# Altium PCB MasterBoard (SurfaceMount).PcbDoc (part 1 of 3)
Units mil, origin at the board's own origin, x right, y up, seen from the top; angles counter-clockwise.
Board outline 2893 x 3176 mil, 4 copper layers (Top Layer, GROUND, POWER, Bottom Layer), stack 23.756 mil thick; 101 components, 58 nets, 327 pads, 95 vias.
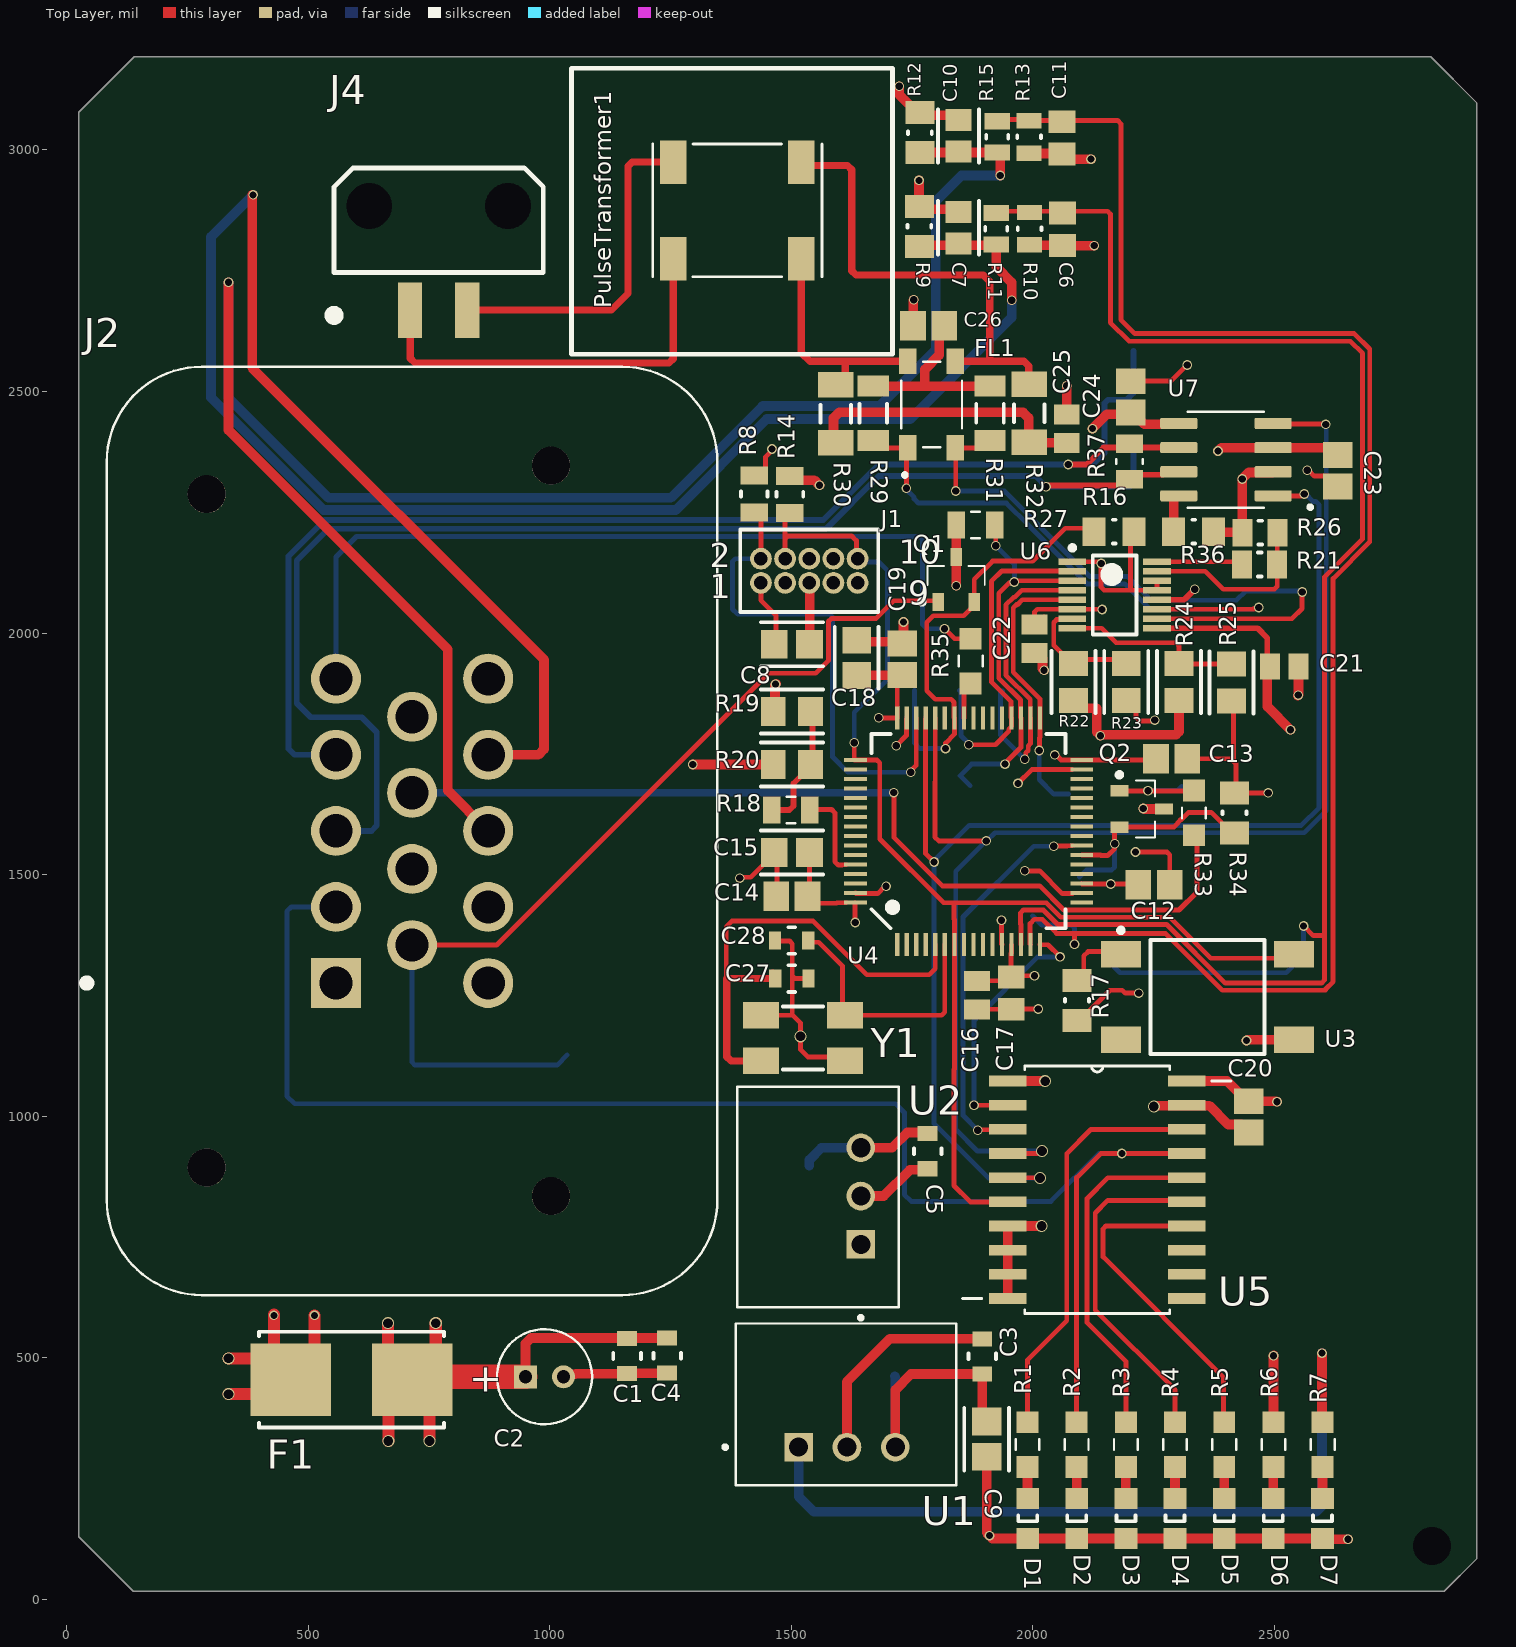
[diagram p0: Top Layer view]
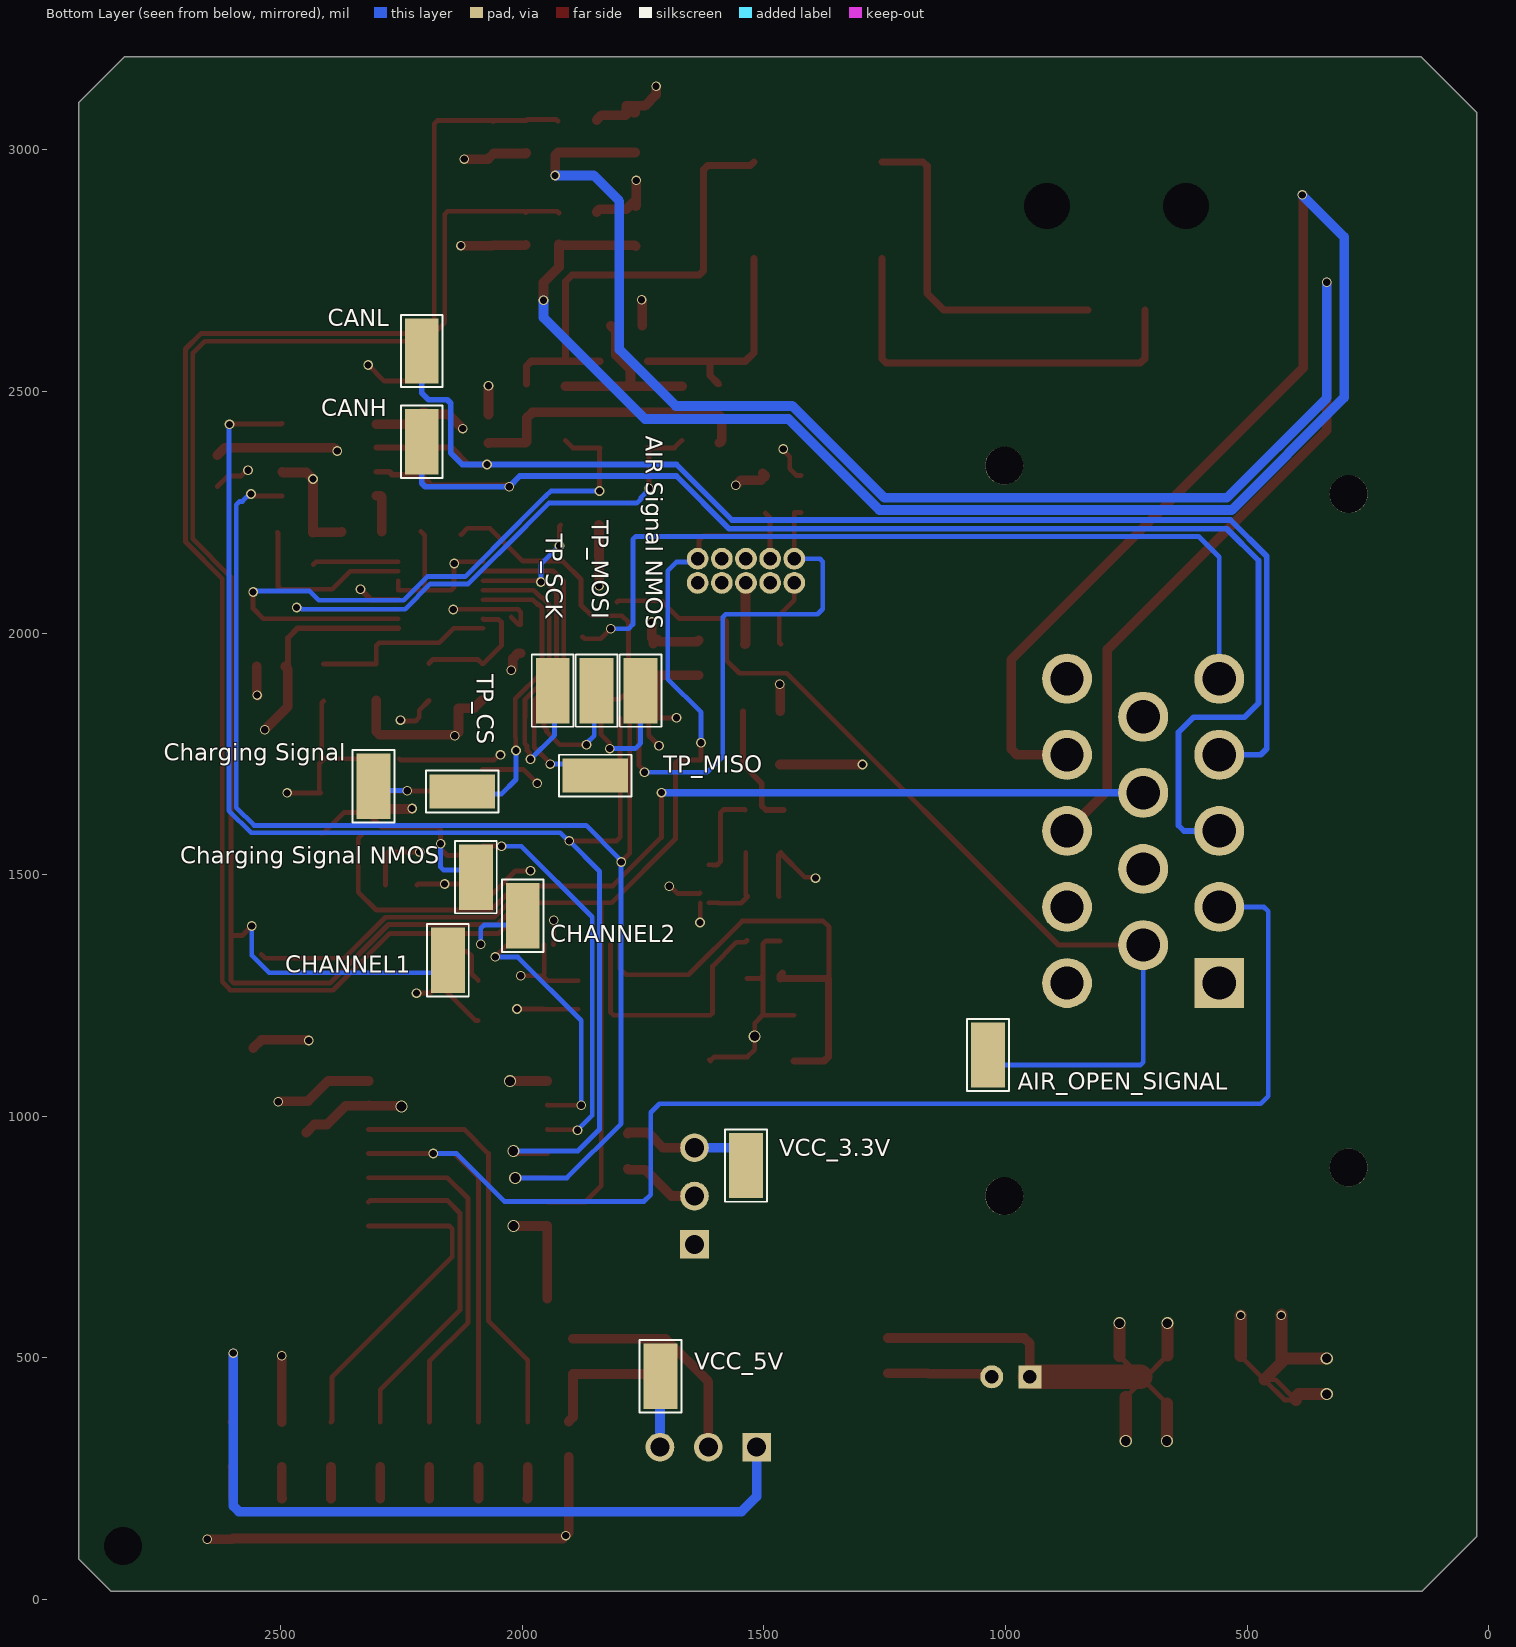
[diagram p1: Bottom Layer view, seen from below]
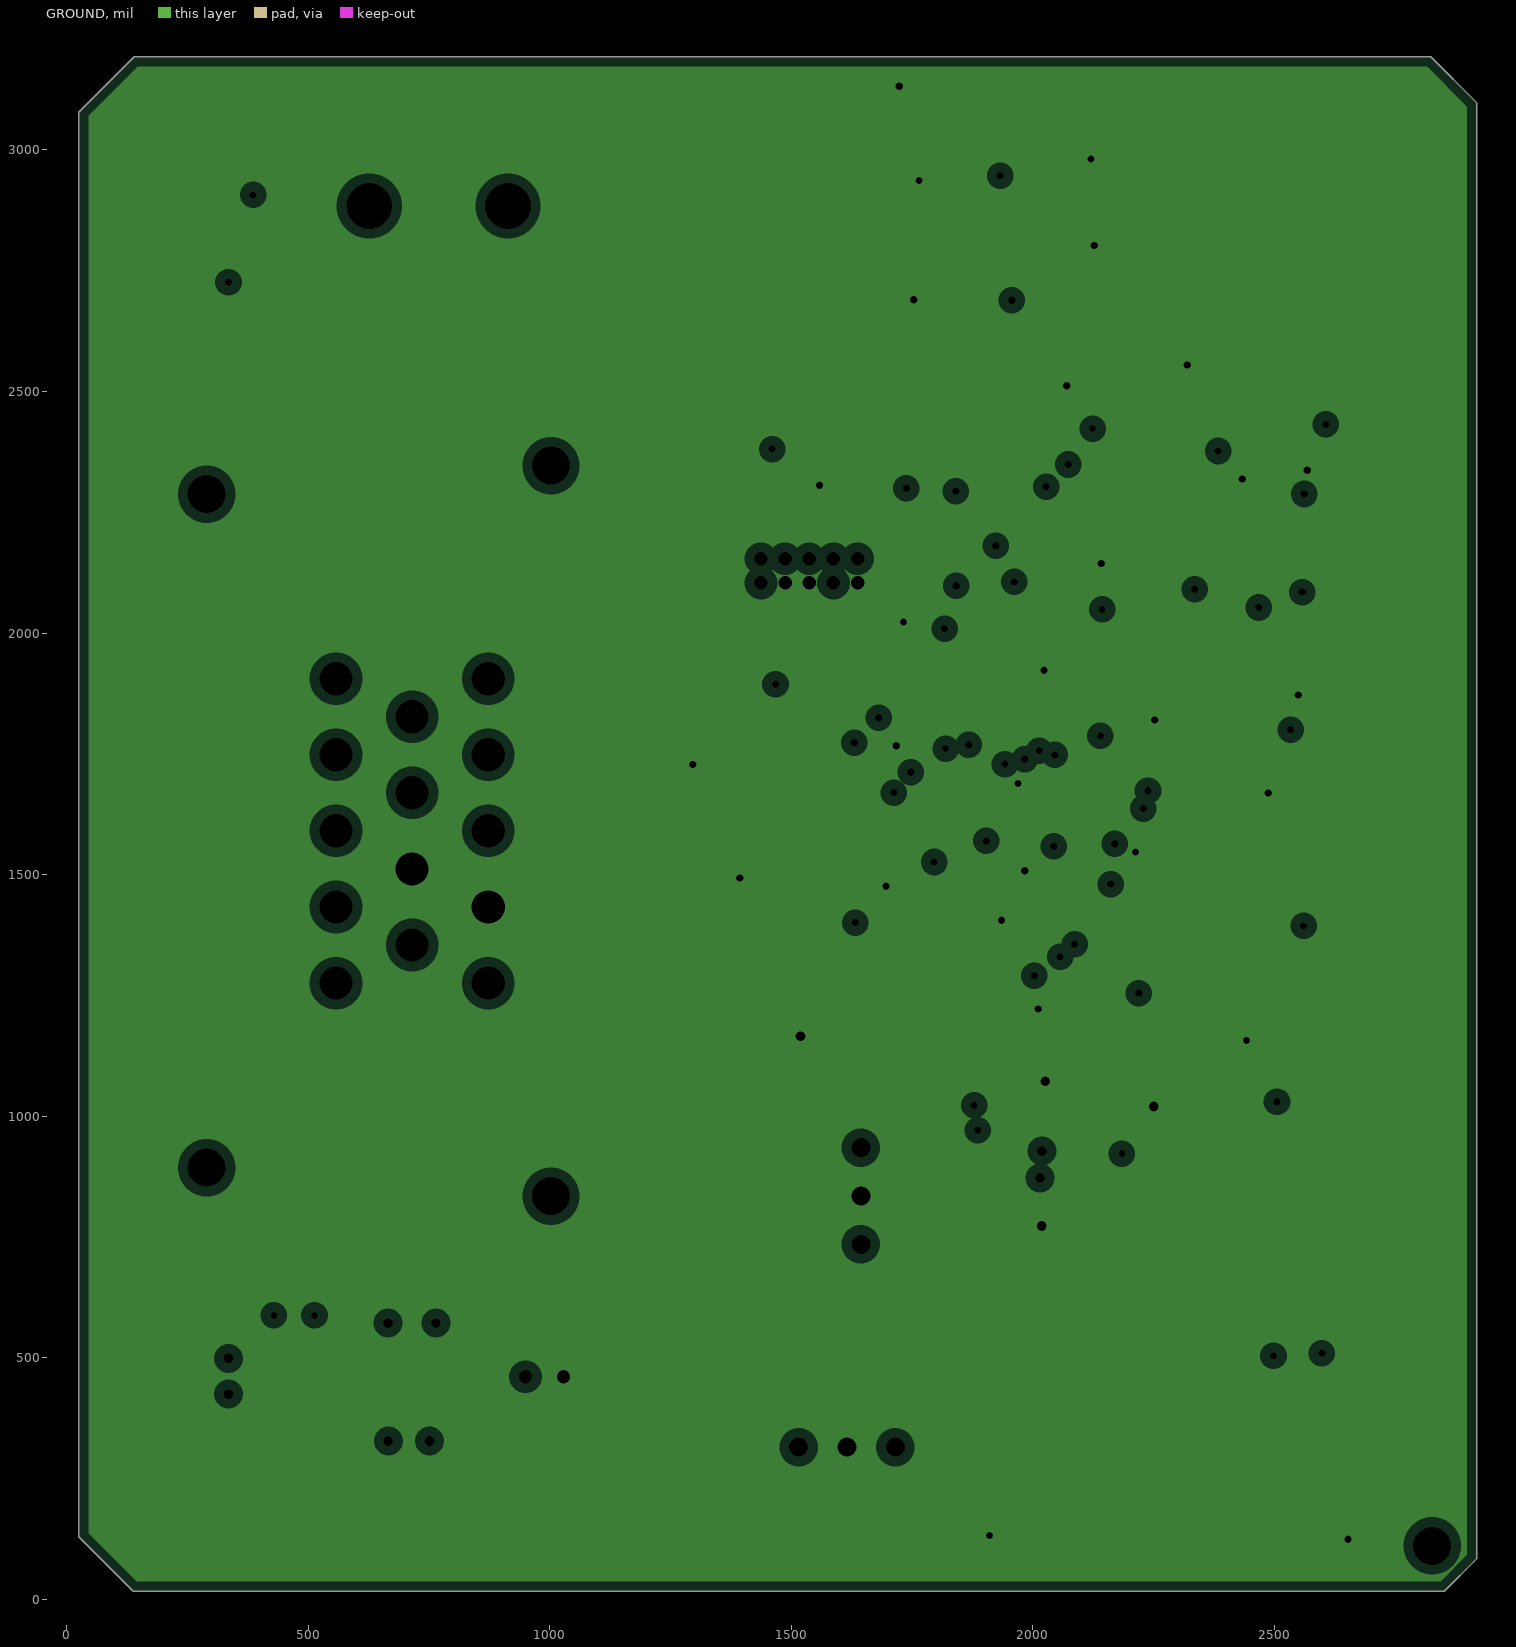
[diagram p2: GROUND, clearances drawn from the general rule]
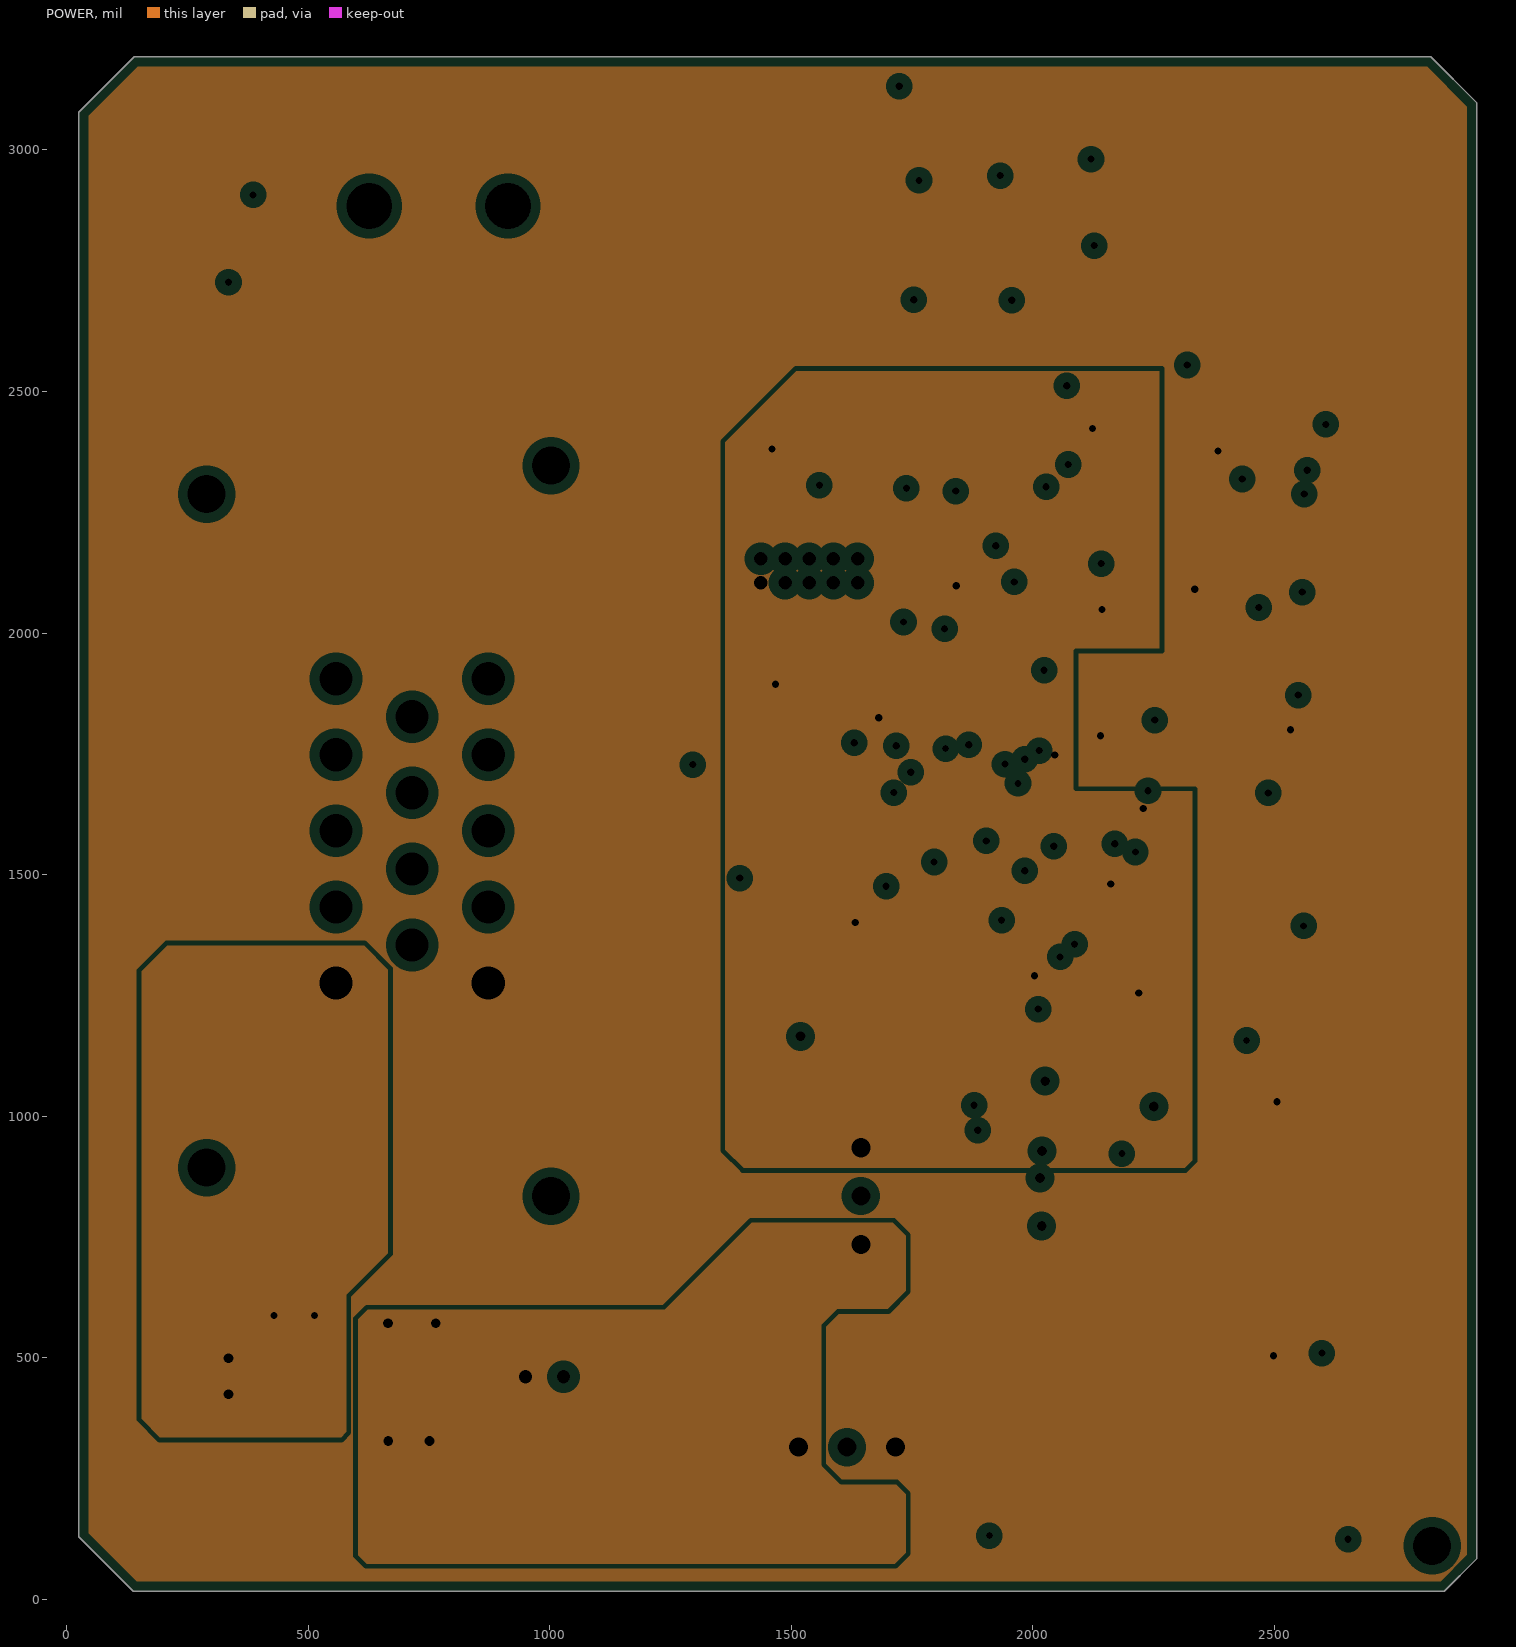
[diagram p3: POWER, clearances drawn from the general rule]
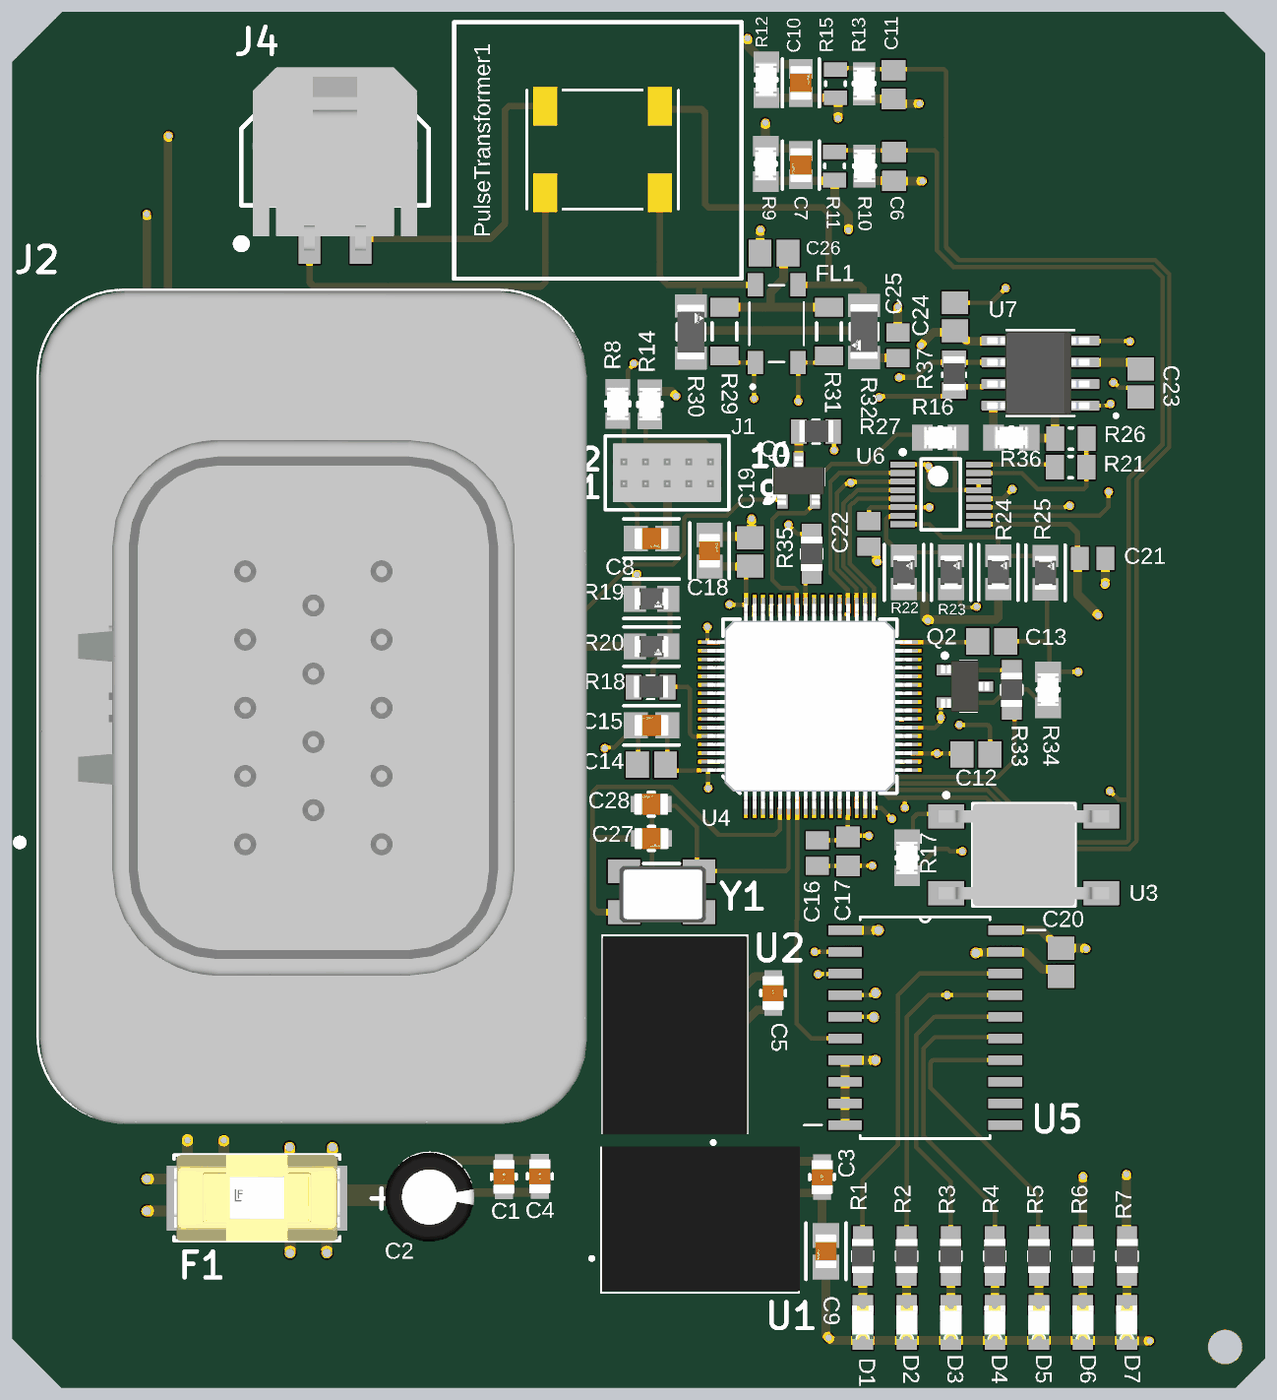
[diagram p5: 3D render of the assembled board from above, using the file's embedded part models]

## Layer stack, top to bottom
Top Solder: solder mask 0.4, Solder Resist, Dk 3.5
Top Layer: signal copper 1.4
Dielectric 2: prepreg 2.8, PP-006, Dk 4.1
GROUND: plane copper 1.378, net GND
Dielectric 1: dielectric 12.6, FR-4, Dk 4.8
POWER: plane copper 1.378, net (Multiple Nets)
Dielectric 3: prepreg 2.8, PP-006, Dk 4.1
Bottom Layer: signal copper 1.4
Bottom Solder: solder mask 0.4, Solder Resist, Dk 3.5

## Board outline
25,130 25,3078 140,3193 2823,3193 2918,3098 2918,84 2851,17 138,17

## Design rules (kind name [scope] priority, off if disabled: settings)
Clearance [All] p1: gap=7.87 ignorepadtopadclearanceinfootprint=TRUE except(5: Arc-Arc Arc-Track Arc-SMDPad Track-Track Track-SMDPad SMDPad-SMDPad; 10: Via-Via)
HoleSize [All] p1: absolutevalues=TRUE maxlimit=200 minlimit=1 maxpercent=80.000 minpercent=20.000
PlaneClearance [All] p1: clearance=20
PlaneConnect [All] p1: planeconnectstyle=Relief reliefexpansion=20 reliefentries=4 reliefconductorwidth=10 reliefairgap=10
PolygonConnect [All] p1: connectstyle=Relief reliefconductorwidth=10 reliefentries=4 polygonreliefangle="90 Angle" airgapwidth=10
RoutingVias [All] p1: holewidth=28 width=50 viastyle="Through Hole" minholewidth=28 minwidth=50 maxholewidth=28 maxwidth=50
SilkToSilkClearance [All] p1: silktosilkclearance=4
SilkToSolderMaskClearance [IsPad] p1: minsilkscreentomaskgap=5 clearancetoexposedcopper=TRUE
SolderMaskExpansion [All] p1: expansion=4 istentingtop=FALSE
Width [All] p1: maxlimit=50 minlimit=8 preferedwidth=10 minimp=50.000000 maximp=50.000000 favimp=50.000000
25 further rules are at their usual default settings.

## Classes and differential pairs
component class CONNECTORS: "AIR Signal NMOS" AIR_OPEN_SIGNAL C6 C7 C8 C9 C10 C11 CHANNEL1 CHANNEL2 "Charging Signal" "Charging Signal NMOS" J1 J2 J4 Q1 Q2 R8 R9 R10 R11 R12 R13 R14 R15 R16 R17 R33 R34 R35 U3
component class PROCESSOR: C12 C13 C14 C15 C16 C17 C18 C19 C20 C27 C28 R18 R19 R20 TP_CS TP_MISO TP_MOSI TP_SCK U4 U5 Y1
component class POWER: C1 C2 C3 C4 C5 D1 D2 D3 D4 D5 D6 D7 F1 R1 R2 R3 R4 R5 R6 R7 U1 U2 VCC_3.3V VCC_5V
component class COMMUNICATIONS: C21 C22 C23 C24 C25 C26 CANH CANL FL1 PulseTransformer1 R21 R22 R23 R24 R25 R26 R27 R29 R30 R31 R32 R36 R37 U6 U7

## Components (designator, comment, footprint, x,y, rotation, side; value= is the part's Value field where it differs from the comment)
"AIR Signal NMOS" "5015" 5015 1755,1881 r90 bottom
AIR_OPEN_SIGNAL "5015" 5015 1036,1127 r90 bottom
C1 "10uF" FP-C2012-125-0_2-MFG 1160,504 r270 top
C2 "10uF" CAPPRD200W50D550H1250 989,461 r0 top value=Value?
C3 "10uF" FP-C2012-125-0_2-MFG 1895,503 r90 top
C4 "10uF" FP-C2012-125-0_2-MFG 1243,505 r270 top
C5 "10uF" FP-C2012-125-0_2-MFG 1782,928 r270 top
C6 "GRM219R71C684KA01D" CAPC2013X95X45NL10T25 2061,2836 r270 top
C7 "GRM2195C1H103JA01D" FP-GRM219-0_1-IPC_B 1846,2839 r270 top
C8 "470nF" FP-GCM21B-0_15-IPC_A 1501,1977 r0 top
C9 "GRM21BR61A476ME15L" FP-GRM21B-0_2-e0_2_0_7-IPC_A 1904,332 r270 top
C10 "GRM2195C1H103JA01D" FP-GRM219-0_1-IPC_B 1846,3029 r90 top
C11 "GRM219R71C684KA01D" CAPC2013X95X45NL10T25 2060,3025 r90 top
C12 "100nF" CAPC2013X145X45NL30T25 2250.48,1479 r180 top
C13 "100nF" CAPC2013X145X45NL30T25 2287,1740 r180 top
C14 "100nF" CAPC2013X145X45NL30T25 1501,1455 r0 top
C15 "4.7uF" FP-GCM21B-0_15-IPC_A 1501,1546 r180 top
C16 "10nF" CAPC2013X70X45LL15T25 1884,1251 r90 top
C17 "1uF" CAPC2013X70X45NL10T25 1955,1255 r90 top
C18 "4.7uF" FP-GCM21B-0_15-IPC_A 1635,1949 r90 top
C19 "100nF" CAPC2013X145X45NL30T25 1729,1946 r270 top
C20 "100nF" CAPC2013X145X45NL30T25 2447,999 r90 top
C21 "10nF" CAPC2013X70X45LL15T25 2520,1931 r180 top
C22 "10nF" CAPC2013X70X45LL15T25 2003,1988 r90 top
C23 "100nF" CAPC2013X145X45NL30T25 2631,2336 r90 top
C24 "100nF" CAPC2013X145X45NL30T25 2202,2489 r270 top
C25 "10nF" CAPC2013X70X45LL15T25 2070,2423 r270 top
C26 "100nF" CAPC2013X145X45NL30T25 1784,2636 r0 top
C27 "18pF" FP-GQM219-0_15-MFG 1500.93,1284.93 r0 top
C28 "18pF" FP-GQM219-0_15-MFG 1500.38,1363.93 r180 top
CANH "5015" 5015 2208,2396 r90 bottom
CANL "5015" 5015 2208,2584 r90 bottom
CHANNEL1 "5015" 5015 2154,1323 r90 bottom
CHANNEL2 "5015" 5015 1999,1415 r90 bottom
"Charging Signal" "5015" 5015 2308,1683 r90 bottom
"Charging Signal NMOS" "5015" 5015 2096,1495 r90 bottom
D1 "HEARTBEAT" 0805_A 1989,167.74 r90 top
D2 "SHUTDOWN" 0805_A 2090.67,167.74 r90 top
D3 "CANRX" 0805_A 2192.33,167.74 r90 top
D4 "CANTX" 0805_A 2294,167.74 r90 top
D5 "RESET" 0805_A 2395.67,167.74 r90 top
D6 "5V" 0805_A 2497.33,167.74 r90 top
D7 "12V Fused" 0805_A 2599,167.74 r90 top
F1 "2A" FP-0154-MFG 589.61,455 r0 top value=0.0625Ω
FL1 "ACT45B-220-2P-TL003" FIL_ACT45B-220-2P-TL003 1790,2473 r90 top
J1 "SAMTEC-FTSH-105-01-X-D" SAMTEC-FTSH-105-01-X-D 1537,2129 r0 top
J2 "1-776261-1" TE_1-776261-1 715,1590.74 r90 top
J4 "43650-0209" 43650-0209 770,2884 r180 top
PulseTransformer1 "PE-68386NLT" PE-68386NL_PUL 1388,2875 r180 top
Q1 "SSM3K329R,LF" SOT23-3 1841,2111 r90 top
Q2 "SSM3K329R,LF" SOT23-3 2225,1636 r0 top
R1 "ERJP06J161V" RES_ERJP06J161V 1988.48,320.74 r90 top
R2 "ERJP06J161V" RES_ERJP06J161V 2090.32,320.74 r90 top
R3 "ERJP06J161V" RES_ERJP06J161V 2192.16,320.74 r90 top
R4 "ERJP06J161V" RES_ERJP06J161V 2294,320.74 r90 top
R5 "ERJP06J161V" RES_ERJP06J161V 2395.84,320.74 r90 top
R6 "ERJP06J161V" RES_ERJP06J161V 2497.68,320.74 r90 top
R7 "ERJP06J161V" RES_ERJP06J161V 2599.52,320.74 r90 top
R8 "CRCW0805100KFKEA" FP-CRCW0805-e3-MFG 1423,2288 r90 top
R9 "CRCW080512K0FKEA" FP-CRCW0805-e3-IPC_A 1765,2842 r90 top
R10 "CRCW08053K09FKEA" FP-CRCW0805-e3-IPC_C 1993,2837 r270 top
R11 "CRCW08051K60FKEA" RESC2013X50X30LL20T20 1924,2837 r90 top
R12 "CRCW080512K0FKEA" FP-CRCW0805-e3-IPC_A 1766,3036 r90 top
R13 "CRCW08053K09FKEA" FP-CRCW0805-e3-IPC_C 1992,3027 r270 top
R14 "CRCW0805100KFKEA" FP-CRCW0805-e3-MFG 1497,2287 r270 top
R15 "CRCW08051K60FKEA" RESC2013X50X30LL20T20 1926,3027 r90 top
R16 "CRCW080510K0FKEA" FP-CRCW0805-e3-IPC_A 2168,2210 r180 top
R17 "CRCW080510K0FKEA" FP-CRCW0805-e3-IPC_A 2091,1240 r270 top
R18 "2k, 1%, 0.4W" RESC2012X50N 1499,1634 r180 top
R19 "0r" FP-CRCW0805-HPe3-IPC_A 1501,1838 r180 top
R20 "0r" FP-CRCW0805-HPe3-IPC_A 1501,1728 r180 top
R21 "806R, 0.1%" RESC2013X50X30NL20T20 2469,2142 r180 top
R22 "0r" FP-CRCW0805-HPe3-IPC_A 2084,1899 r270 top
R23 "0r" FP-CRCW0805-HPe3-IPC_A 2193,1899 r270 top
R24 "0r" FP-CRCW0805-HPe3-IPC_A 2302,1899 r270 top
R25 "0r" FP-CRCW0805-HPe3-IPC_A 2411,1898 r270 top
R26 "1.21K, 0.1%, 1/5W" RESC2013X50X30NL20T20 2470,2208 r0 top
R27 "2k, 1%, 0.4W" RESC2012X50N 1881,2224 r180 top
R29 "ERJ-8ENF62R0V" RESC3216X70X50NL05T20 1669.54,2455 r270 top
R30 "CRCW1206300RFKEA" FP-CRCW1206-e3-IPC_A 1592,2454 r90 top
R31 "ERJ-8ENF62R0V" RESC3216X70X50NL05T20 1911,2455 r90 top
R32 "CRCW1206300RFKEA" FP-CRCW1206-e3-IPC_A 1992,2455 r270 top
R33 "ERJP06J161V" RES_ERJP06J161V 2333,1628 r270 top
R34 "CRCW080510K0FKEA" FP-CRCW0805-e3-IPC_A 2417,1628 r270 top
R35 "ERJP06J161V" RES_ERJP06J161V 1871,1942 r90 top
R36 "10k, 1%, 1/8W" FP-CRCW0805-e3-IPC_A 2332.33,2210 r0 top
R37 "120r, 0.1%, 1/8w" RESC2012X55N 2200,2355 r270 top
TP_CS "5015" 5015 2124,1672 r180 bottom
TP_MISO "5015" 5015 1849,1705 r0 bottom
TP_MOSI "5015" 5015 1846,1881 r90 bottom
TP_SCK "5015" 5015 1937,1881 r90 bottom
U1 "R-78E5.0-1.0" CONV_R-78E5.0-1.0 1615,404 r0 top
U2 "R-78E3.3-1.0" CONV_R-78E3.3-1.0 1555,835 r90 top
U3 "TL3301NF260QG" TECO-FSM4JSMA_V 2361,1247 r90 top
U4 "STM32F091RCT6" TQFP64 1866.75,1590.1 r0 top
U5 "74ACT541SC" SOIC127P1032X265-20N 2133,848 r0 top
U6 "LTC6820IMS#TRPBF" TSSOP50P490X110-16N 2169,2079 r0 top
U7 "NXP CAN Transceiver" "NXP CAN Tranceiver" 2399.36,2359 r180 top
VCC_3.3V "5015" 5015 1537,898 r90 bottom
VCC_5V "5015" 5015 1714,462 r90 bottom
Y1 "48MHZ" OSCCC500X320X110-4N 1524,1162 r0 top

## Footprints (in the part's own frame and the unit in brackets; to place one, negate y for a bottom-side part, rotate by r counter-clockwise, add the part's x,y. Pads: shape width x height; smd on the part's side, far side on the other; paste and mask are expansions set on the pad)
0805_A [mm] "Chip LED, 2-Leads, Body 2.0x1.3mm, IPC Medium Density"
  rect 1.1x1.2 smd: 1(-1.05,0) 2(1.05,0)
  silkscreen extent -0.15,-0.5 0.15,0.5, body extent -1,-0.62 1,0.63, height 0.68
5015 [mm] "SMD Test Point"
  rect 3.43x1.78 smd: 1(0,0)
  silkscreen extent -1.9,-1.1 1.9,1.1, body extent -1.27,-0.51 1.4,0.51, height 1.52
43650-0209 [mm]
  rect 1.27x2.92 smd: 1(1.5,5.47) 2(-1.5,5.47)
  round 0 hole 2.41 unplated: ""(-3.65,0) ""(3.65,0)
  silkscreen extent -5.5,-2 5.7,5.95, body extent -4.82,-4.6 4.83,6.14, height 5.64
CAPC2013X70X45LL15T25 [mm] "Chip Capacitor, 2-Leads, Body 2.00x1.25mm, IPC High Density"
  rect 1.05x1.35 smd: 1(-0.75,0) 2(0.75,0)
  body extent -1.08,-0.7 1.07,0.7, height 0.7
CAPC2013X70X45NL10T25 [mm] "Chip Capacitor, 2-Leads, Body 2.00x1.25mm, IPC Medium Density"
  rect 1.2x1.4 smd: 1(-0.85,0) 2(0.85,0)
  body extent -1.05,-0.67 1.05,0.67, height 0.7
CAPC2013X95X45NL10T25 [mm] "Chip Capacitor, 2-Leads, Body 2.00x1.25mm, IPC Medium Density"
  rect 1.2x1.4 smd: 1(-0.85,0) 2(0.85,0)
  body extent -1.05,-0.67 1.05,0.67, height 0.95
CAPC2013X145X45NL30T25 [mm] "Chip Capacitor, 2-Leads, Body 2.00x1.25mm, IPC Medium Density"
  rect 1.35x1.55 smd: 1(-0.825,0) 2(0.825,0)
  body extent -1.15,-0.77 1.15,0.77, height 1.45
CAPPRD200W50D550H1250 [mm]
  rect 1.208x1.208 hole 0.7: 1(-1,0)
  round 1.208 hole 0.7: 2(1,0)
  silkscreen extent -2.5,-2.5 2.5,2.5, body extent -2.65,-2.72 2.61,2.52, height 11.01
CONV_R-78E3.3-1.0 [mm]
  rect 1.508x1.508 hole 1: 1(-2.54,-2.25)
  round 1.508 hole 1: 2(0,-2.25) 3(2.54,-2.25)
  silkscreen extent -6.5,-4.25 5.75,4.25, body extent -5.93,-4.25 5.67,4.25, height 9.9
CONV_R-78E5.0-1.0 [mm]
  rect 1.508x1.508 hole 1: 1(-2.54,-2.25)
  round 1.508 hole 1: 2(0,-2.25) 3(2.54,-2.25)
  silkscreen extent -6.5,-4.25 5.75,4.25, body extent -5.8,-4.17 5.8,4.33, height 9.9
FIL_ACT45B-220-2P-TL003 [mm]
  rect 1.35x0.9 smd: 1(-2.275,1.25) 2(-2.275,-1.25) 3(2.275,-1.25) 4(2.275,1.25)
  silkscreen extent -3.8,-1.6 2.25,1.6
FP-0154-MFG [mm]
  rect 4.24x3.81 smd paste+0 mask+0: 1(-3.185,0) 2(3.185,0)
  silkscreen extent -4.86,-2.51 4.86,2.51, body extent -5.41,-2.62 5.41,2.62, height 0.25
FP-C2012-125-0_2-MFG [mm]
  rect 0.8x1.05 smd paste+0 mask+0: 1(-0.925,0) 2(0.925,0)
  silkscreen extent -0.15,-0.72 0.15,0.72, body extent -1.43,-0.82 1.43,0.82, height 0.25
FP-CRCW0805-e3-IPC_A [mil]
  rect 47.5x59.38 smd paste+0 mask+0: 1(-41.37,0) 2(41.37,0)
  silkscreen extent -3,-25 3,25, body extent -85,-49 85,49, height 10
FP-CRCW0805-e3-IPC_C [mil]
  rect 31.75x51.5 smd paste+0 mask+0: 1(-33.5,0) 2(33.5,0)
  silkscreen extent -3,-25 3,25, body extent -53,-31 53,31, height 10
FP-CRCW0805-e3-MFG [mm]
  rect 0.95x1.45 smd paste+0 mask+0: 1(-0.975,0) 2(0.975,0)
  silkscreen extent -0.13,-0.7 0.13,0.7, body extent -1.55,-0.82 1.55,0.82, height 0.25
FP-CRCW0805-HPe3-IPC_A [mil]
  rect 51.42x59.38 smd paste+0 mask+0: 1(-38.43,0) 2(38.43,0)
  silkscreen extent -64,-45 64,45, body extent -84,-49 84,49, height 10
FP-CRCW1206-e3-IPC_A [mil]
  rect 53.39x73.16 smd paste+0 mask+0: 1(-60.08,0) 2(60.08,0)
  silkscreen extent -19,-31 19,31, body extent -106,-56 106,56, height 10
FP-GCM21B-0_15-IPC_A [mil]
  rect 55.34x59.38 smd paste+0 mask+0: 1(-36.47,0) 2(36.47,0)
  silkscreen extent -64,-45 64,45, body extent -84,-49 84,49, height 10
FP-GQM219-0_15-MFG [mm]
  rect 0.65x0.95 smd paste+0 mask+0: 1(-0.875,0) 2(0.875,0)
  silkscreen extent -0.18,-0.7 0.18,0.7, body extent -1.3,-0.8 1.3,0.8, height 0.25
FP-GRM21B-0_2-e0_2_0_7-IPC_A [mil]
  rect 57.27x61.27 smd paste+0 mask+0: 1(-36.45,0) 2(36.45,0)
  silkscreen extent -65,-46 65,46, body extent -85,-50 85,50, height 10
FP-GRM219-0_1-IPC_B [mil]
  rect 45.58x53.63 smd paste+0 mask+0: 1(-32.57,0) 2(32.57,0)
  silkscreen extent -55,-43 55,43, body extent -65,-37 65,37, height 10
"NXP CAN Tranceiver" [mm]
  rrect25% 1.95x0.59 smd: 1(-2.48,1.905) 2(-2.48,0.635) 3(-2.48,-0.635) 4(-2.48,-1.905) 5(2.48,-1.905) 6(2.48,-0.635) 7(2.48,0.635) 8(2.48,1.905)
  silkscreen extent -4.53,-2.52 2,2.59, body extent -2.87,-2.45 3.13,2.45, height 1.75
OSCCC500X320X110-4N [mm]
  rect 1.9x1.4 smd: 1(-2.2,-1.2) 2(2.2,-1.2) 3(2.2,1.2) 4(-2.2,1.2)
  silkscreen extent -1.05,-1.65 1.05,1.65, body extent -2.46,-1.8 2.62,1.5, height 1.1
PE-68386NL_PUL [mil]
  rect 55x90 smd paste-27.5 mask+0: 1(-132.5,100) 2(-132.5,-100) 3(132.5,-100) 4(132.5,100)
  silkscreen extent -175,-138 175,138, body extent 0,0 10,10, height 10
RES_ERJP06J161V [mm]
  rect 1.15x1.15 smd: 1(-1.175,0) 2(1.175,0)
  silkscreen extent -0.28,-0.63 0.28,0.63, body extent -1,-0.62 1,0.63, height 0.6
RESC2012X50N [mm]
  rect 0.92x1.42 smd: 1(-1,0) 2(1,0)
  silkscreen extent -0.22,-0.7 0.22,0.7, body extent -1.03,-0.65 0.97,0.6, height 0.5
RESC2012X55N [mm]
  rect 0.97x1.42 smd: 1(-0.93,0) 2(0.93,0)
  silkscreen extent -0.12,-0.7 0.12,0.7, body extent -1.08,-0.62 0.92,0.63, height 0.55
RESC2013X50X30LL20T20 [mm] "Chip Resistor, 2-Leads, Body 2.00x1.25mm, IPC High Density"
  rect 0.85x1.35 smd: 1(-0.825,0) 2(0.825,0)
  silkscreen extent -0.1,-0.58 0.1,0.58, body extent -1.1,-0.72 1.1,0.72, height 0.5
RESC2013X50X30NL20T20 [mm] "Chip Resistor, 2-Leads, Body 2.00x1.25mm, IPC Medium Density"
  rect 1.05x1.45 smd: 1(-0.925,0) 2(0.925,0)
  silkscreen extent -0.1,-0.63 0.1,0.63, body extent -1.1,-0.72 1.1,0.72, height 0.5
RESC3216X70X50NL05T20 [mm] "Chip Resistor, 2-Leads, Body 3.20x1.60mm, IPC Medium Density"
  rect 1.1x1.65 smd: 1(-1.425,0) 2(1.425,0)
  silkscreen extent -0.5,-0.72 0.5,0.72, body extent -1.63,-0.82 1.62,0.82, height 0.7
SAMTEC-FTSH-105-01-X-D [mil]
  round 45 hole 27.95 mask+0: 1(-100,-25) 2(-100,25) 3(-50,-25) 4(-50,25) 5(0,-25) 6(0,25) 7(50,-25) 8(50,25) 9(100,-25) 10(100,25)
  silkscreen extent -143,-85 143,85, body extent -125,-67 125,68, height 219
SOIC127P1032X265-20N [mil]
  rect 78x22 smd: 1(-185,225) 2(-185,175) 3(-185,125) 4(-185,75) 5(-185,25) 6(-185,-25) 7(-185,-75) 8(-185,-125) 9(-185,-175) 10(-185,-225) 11(185,-225) 12(185,-175) 13(185,-125) 14(185,-75) 15(185,-25) 16(185,25) 17(185,75) 18(185,125) 19(185,175) 20(185,225)
  silkscreen extent -279,-256 277,256
SOT23-3 [mm] "SOT23, 3-Leads, Body 2.90x2.40mm, Pitch 0.95mm, IPC Medium Density"
  rect 0.95x0.6 smd: 1(-1.175,0.95) 2(-1.175,-0.95) 3(1.175,0)
  silkscreen extent -1.3,-1.5 0.7,1.92, body extent -1.42,-1.5 1.42,1.5, height 1.2
TE_1-776261-1 [mm]
  rect 2.625x2.625 hole 1.75: 1(-8,4)
  round 2.625 hole 1.75: 2(-4,4) 3(0,4) 4(4,4) 5(8,4) 6(-6,0) 7(-2,0) 8(2,0) 9(6,0) 10(-8,-4) 11(-4,-4) 12(0,-4) 13(4,-4) 14(8,-4)
  round 2 hole 2 unplated: ""(-19.2,-7.3) ""(-17.7,10.8) ""(17.7,10.8) ""(19.2,-7.3)
  silkscreen extent -24.4,-16.05 24.4,17.3, body extent -24.51,-16.18 24.29,15.92, height 34.29
TECO-FSM4JSMA_V [mm] "SMD, 4-Leads, Body 6x6mm, Pitch 4.5mm"
  rect 1.4x2.1 smd: 1(2.25,4.55) 2(2.25,-4.55) 3(-2.25,4.55) 4(-2.25,-4.55)
  silkscreen extent -3,-3 3.62,4.67, body extent -3,-5 3,5, height 5.08
TQFP64 [mm]
  rect 0.22x1.2 smd paste-2: 1(-3.75,-5.95) 2(-3.25,-5.95) 3(-2.75,-5.95) 4(-2.25,-5.95) 5(-1.75,-5.95) 6(-1.25,-5.95) 7(-0.75,-5.95) 8(-0.25,-5.95) 9(0.25,-5.95) 10(0.75,-5.95) 11(1.25,-5.95) 12(1.75,-5.95) 13(2.25,-5.95) 14(2.75,-5.95) 15(3.25,-5.95) 16(3.75,-5.95) 33(3.75,5.95) 34(3.25,5.95) 35(2.75,5.95) 36(2.25,5.95) 37(1.75,5.95) 38(1.25,5.95) 39(0.75,5.95) 40(0.25,5.95) 41(-0.25,5.95) 42(-0.75,5.95) 43(-1.25,5.95) 44(-1.75,5.95) 45(-2.25,5.95) 46(-2.75,5.95) 47(-3.25,5.95) 48(-3.75,5.95)
  rect 1.2x0.22 smd paste-2: 17(5.95,-3.75) 18(5.95,-3.25) 19(5.95,-2.75) 20(5.95,-2.25) 21(5.95,-1.75) 22(5.95,-1.25) 23(5.95,-0.75) 24(5.95,-0.25) 25(5.95,0.25) 26(5.95,0.75) 27(5.95,1.25) 28(5.95,1.75) 29(5.95,2.25) 30(5.95,2.75) 31(5.95,3.25) 32(5.95,3.75) 49(-5.95,3.75) 50(-5.95,3.25) 51(-5.95,2.75) 52(-5.95,2.25) 53(-5.95,1.75) 54(-5.95,1.25) 55(-5.95,0.75) 56(-5.95,0.25) 57(-5.95,-0.25) 58(-5.95,-0.75) 59(-5.95,-1.25) 60(-5.95,-1.75) 61(-5.95,-2.25) 62(-5.95,-2.75) 63(-5.95,-3.25) 64(-5.95,-3.75)
  silkscreen extent -5.1,-5.1 5.1,5.1, body extent -6,-6 6,6, height 1.58
TSSOP50P490X110-16N [mm] "TSSOP, 16-Leads, Body 3.77x3.00mm, Pitch 0.50mm, IPC Medium Density"
  rect 1.45x0.35 smd: 1(-2.225,1.75) 2(-2.225,1.25) 3(-2.225,0.75) 4(-2.225,0.25) 5(-2.225,-0.25) 6(-2.225,-0.75) 7(-2.225,-1.25) 8(-2.225,-1.75) 9(2.225,-1.75) 10(2.225,-1.25) 11(2.225,-0.75) 12(2.225,-0.25) 13(2.225,0.25) 14(2.225,0.75) 15(2.225,1.25) 16(2.225,1.75)
  silkscreen extent -2.35,-2.08 1.15,2.6, body extent -1.55,-2.05 1.55,2.05, height 1.1

## Part data
"AIR Signal NMOS" AIR_OPEN_SIGNAL CANH CANL CHANNEL1 CHANNEL2 "Charging Signal" "Charging Signal NMOS" TP_CS TP_MISO TP_MOSI TP_SCK VCC_3.3V VCC_5V: "SMD Test Point", Manufacturer="Keystone Electronics", ComponentLink1Description=Datasheet, ComponentLink1URL=http://www.mouser.com/ds/2/215/005-5009-743680.pdf, PartNumber=5015, Published=22Oct2016, Publisher=T.Tallo, Status=Active, TargetLibrary=RITRacing-Connectors
C1 C3 C4 C5: library part CMP-08246-003655-1, "Multilayer Ceramic Capacitors 10μF ±10% 16V X6S SMD 0805", Case Code (Imperial)=0805, Case Code (Metric)=2012, Dielectric=X6S, Dielectric Material=Ceramic, Max Operating Temperature=105°C, Min Operating Temperature=-55°C, Package Quantity=1, Supplier Part Number 1=445-7611-1-ND, Tolerance=10%, Voltage Rating=16V, Capacitance=10uF, Case/Package=0805, Construction=Flat, Contact Plating=Tin, Depth=1.25mm, Height=1.25mm, Lead Free="Lead Free", Length=2mm, Mount="Surface Mount", Packaging="Tape and Reel", REACH SVHC="No SVHC", RoHS Compliant=Yes, Series=C, Supplier 1=Digi-Key, Thickness=0.057inch, Voltage Rating (DC)=16V, Width=0.049inch
C2: library part "Cap, TH, Electrolytic_5mm", "Cap Alum 10UF 20% 25V Radial", Manufacturer 1=KEMET, Manufacturer Part Number 1=ESW106M025AC3AA, Supplier Part Number 1=399-ESW106M025AC3AA-ND, Pricing 1="1=0.23000, 10=0.15400, 50=0.09260, 100=0.07820, 500=0.05352, 1000=0.04735, 2500=0.04529, 5000=0.04117 (USD)", Published=22Oct2016, Publisher=T.Tallo, RoHS Compliant=Yes, Status=Active, Stock 1=7476, Supplier 1=Digi-Key, TargetLibrary=RITRacing-Passives
C6 C11: library part CMP-2007-00190-1, Capacitance=680nF, Case Code (Imperial)=0805, Case Code (Metric)=2012, Dielectric=X7R, Manufacturer=Murata, Max Operating Temperature=125°C, Min Operating Temperature=-55°C, Package Quantity=1, Supplier Part Number 1=490-4741-1-ND, Tolerance=10%, Voltage=16V, Case/Package=0805, Category="Ceramic Capacitors", ComponentLink1Description=https://datasheet.ciiva.com/136/grm219r71c684ka01-01-136854.pdf?src-supplier=Digi-Key, ComponentLink1URL=https://datasheet.ciiva.com/136/grm219r71c684ka01-01-136854.pdf?src-supplier=Digi-Key, ComponentLink2Description=https://datasheet.ciiva.com/136/grm219r71c684ka01-01-136855.pdf?src-supplier=Digi-Key, ComponentLink2URL=https://datasheet.ciiva.com/136/grm219r71c684ka01-01-136855.pdf?src-supplier=Digi-Key, ComponentLink3Description=https://datasheet.ciiva.com/136/grm219r71c684ka01-01-136856.pdf?src-supplier=Digi-Key, ComponentLink3URL=https://datasheet.ciiva.com/136/grm219r71c684ka01-01-136856.pdf?src-supplier=Digi-Key, ComponentLink4Description=https://datasheet.ciiva.com/5426/product-5426512.pdf?src-supplier=Mouser, ComponentLink4URL=https://datasheet.ciiva.com/5426/product-5426512.pdf?src-supplier=Mouser, ComponentLink5Description=https://datasheet.ciiva.com/11464/product-11464042.pdf?src-supplier=Avnet, ComponentLink5URL=https://datasheet.ciiva.com/11464/product-11464042.pdf?src-supplier=Avnet, Construction=Flat, Depth=1.25mm, Height=0.85mm, Lead Free="Lead Free", Length=2mm, Manufacturer 1=Murata, Manufacturer 2=Murata, Manufacturer 3=Murata, Manufacturer Part Number 1=GRM219R71C684KA01D, Manufacturer Part Number 2=GRM219R71C684KA01D, Manufacturer Part Number 3=GRM219R71C684KA01D, Material=Ceramic, Mount="Surface Mount", Packaging="Tape and Reel", Part Number=GRM219R71C684KA01D, Pricing 1="1=0.33000, 10=0.22300, 50=0.14860, 100=0.12630, 500=0.08914, 1000=0.07800 (USD)", Pricing 2="1=0.33000, 10=0.22300, 50=0.14860, 100=0.12630, 500=0.08914, 1000=0.07800 (USD)", Pricing 3="1=0.32000, 10=0.22300, 50=0.22300, 100=0.12700, 500=0.09000, 1000=0.07800, 2000=0.07500, 4000=0.06800, 8000=0.05600, 10000=0.05600 (USD)", Radiation Hardening=No, RoHS=Yes, RoHS Compliant=Yes, Series=GRM, Stock 1=28535, Stock 2=28535, Stock 3=83, Supplier 1=Digi-Key, Supplier 2=Digi-Key, Supplier 3=Mouser, Supplier Part Number 2=490-4741-6-ND, Supplier Part Number 3=81-GRM219R71C684KA1D, Termination=SMD/SMT, Thickness=0.037inch, Voltage Rating=16V, Voltage Rating (DC)=16V, Width=1.25mm
C7 C10: library part CMP-2007-00135-2, "Chip Multilayer Ceramic Capacitors for General Purpose, 0805, 10000pF, C0G, 30ppm/°C, 5%, 50V", Capacitance=10nF, Case Code (Imperial)=0805, Case Code (Metric)=2012, Dielectric=C0G, Dielectric Material=Ceramic, Insulation Resistance=10GR, Manufacturer 1=Murata, Max Operating Temperature=125°C, Min Operating Temperature=-55°C, Package Quantity=1, Supplier Part Number 1=08AC2712, Temperature Coefficient=30ppm/°C, Tolerance=5%, Voltage=50V, Case/Package=0805, Category="Ceramic Capacitors", ComponentLink1Description=https://datasheet.ciiva.com/3777/376grm2195c1h103ja0123-3777227.pdf?src-supplier=Arrow+Electronics, ComponentLink1URL=https://datasheet.ciiva.com/3777/376grm2195c1h103ja0123-3777227.pdf?src-supplier=Arrow+Electronics, ComponentLink2Description=https://datasheet.ciiva.com/11786/0900766b807a1cab-11786595.pdf?src-supplier=RSComponents, ComponentLink2URL=https://datasheet.ciiva.com/11786/0900766b807a1cab-11786595.pdf?src-supplier=RSComponents, ComponentLink3Description=https://datasheet.ciiva.com/19476/1858501-19476200.pdf?src-supplier=Jameco, ComponentLink3URL=https://datasheet.ciiva.com/19476/1858501-19476200.pdf?src-supplier=Jameco, ComponentLink4Description=https://datasheet.ciiva.com/29200/452695-da-01-en-vs-kondensator-0805-29200853.pdf?src-supplier=Conrad, ComponentLink4URL=https://datasheet.ciiva.com/29200/452695-da-01-en-vs-kondensator-0805-29200853.pdf?src-supplier=Conrad, ComponentLink5Description=https://datasheet.ciiva.com/138/partnumbering-e-01-138167.pdf?src-supplier=Digi-Key, ComponentLink5URL=https://datasheet.ciiva.com/138/partnumbering-e-01-138167.pdf?src-supplier=Digi-Key, ComponentLink6Description=https://datasheet.ciiva.com/138/partnumbering-e-01-138165.pdf?src-supplier=Digi-Key, ComponentLink6URL=https://datasheet.ciiva.com/138/partnumbering-e-01-138165.pdf?src-supplier=Digi-Key, ComponentLink7Description=https://datasheet.ciiva.com/138/partnumbering-e-01-138166.pdf?src-supplier=Digi-Key, ComponentLink7URL=https://datasheet.ciiva.com/138/partnumbering-e-01-138166.pdf?src-supplier=Digi-Key, ComponentLink8Description=https://datasheet.ciiva.com/2989/product-2989652.pdf?src-supplier=Avnet, ComponentLink8URL=https://datasheet.ciiva.com/2989/product-2989652.pdf?src-supplier=Avnet, ComponentLink9Description=https://datasheet.ciiva.com/11620/product-11620062.pdf?src-supplier=Avnet, ComponentLink9URL=https://datasheet.ciiva.com/11620/product-11620062.pdf?src-supplier=Avnet, ComponentLink10Description=https://datasheet.ciiva.com/7828/4360-7828972.pdf?src-supplier=Element14, ComponentLink10URL=https://datasheet.ciiva.com/7828/4360-7828972.pdf?src-supplier=Element14, ComponentLink11Description=https://datasheet.ciiva.com/7828/1747462-7828970.pdf?src-supplier=Element14, ComponentLink11URL=https://datasheet.ciiva.com/7828/1747462-7828970.pdf?src-supplier=Element14, ComponentLink12Description=https://datasheet.ciiva.com/7828/1747462-7828971.pdf?src-supplier=Element14, ComponentLink12URL=https://datasheet.ciiva.com/7828/1747462-7828971.pdf?src-supplier=Element14, Construction=Flat, Depth=1.25mm, Height=0.85mm, Lead Free="Lead Free", Length=2mm, Manufacturer 2=Murata, Manufacturer Part Number 1=GRM2195C1H103JA01D, Manufacturer Part Number 2=GRM2195C1H103JA01D, Material=Ceramic, Mount="Surface Mount", Number of Pins=2, Packaging="Tape and Reel", Pricing 1="1=0.09100, 4000=0.09100 (USD)", Pricing 2="1=0.38000, 10=0.25900, 50=0.17300, 100=0.14700, 500=0.10378, 1000=0.09080 (USD)", Radiation Hardening=No, REACH SVHC="No SVHC", RoHS=Yes, RoHS Compliant=Yes, Series=GRM, Size=0.85mm, Stock 1=44000, Supplier 1=Newark, Supplier 2=Digi-Key, Supplier Part Number 2=490-1642-1-ND, Termination=SMD/SMT, Thickness=0.037inch, Voltage Rating=50V, Voltage Rating (DC)=50V, Width=0.049inch
C8: library part CMP-2007-03360-2, "Ceramic Capacitor for Automotive 470nF ±10% 50VDC X7R 0805 Embossed T/R", Case Code (Imperial)=0805, Case Code (Metric)=2012, Dielectric=X7R, Manufacturer 1=Murata, Manufacturer Part Number 1=GCM21BR71H474KA55K, Max Operating Temperature=125°C, Min Operating Temperature=-55°C, Package Quantity=10000, Ratings=AEC-Q200, Supplier Part Number 1=490-11164-1-ND, Tolerance=10%, Voltage Rating=50V, Capacitance=470nF, Case/Package=0805, Category="Ceramic Capacitors", ComponentLink1Description=https://datasheet.ciiva.com/171/product-171550.pdf?src-supplier=Digi-Key, ComponentLink1URL=https://datasheet.ciiva.com/171/product-171550.pdf?src-supplier=Digi-Key, ComponentLink2Description=https://datasheet.ciiva.com/11673/product-11673422.pdf?src-supplier=Avnet, ComponentLink2URL=https://datasheet.ciiva.com/11673/product-11673422.pdf?src-supplier=Avnet, Construction=Flat, Depth=1.25mm, Height=1.25mm, Length=2mm, Mount="Surface Mount", Packaging="Tape and Reel", Pricing 1="1=0.30000, 10=0.20800, 50=0.13860, 100=0.11780, 500=0.08318, 1000=0.07279, 2500=0.06932, 5000=0.06412 (USD)", Radiation Hardening=No, RoHS=Yes, RoHS Compliant=Yes, Series=GCM, Stock 1=26700, Supplier 1=Digi-Key, Termination=SMD/SMT, Thickness=0.055inch, Voltage Rating (DC)=50V, Width=0.049inch
C9: library part CMP-2000-06341-2, "Chip Multilayer Ceramic Capacitors for General Purpose, 0805, 47uF, X5R, 15%, 20%, 10V", Capacitance=47uF, Case Code (Imperial)=0805, Case Code (Metric)=2012, Dielectric=X5R, Dielectric Material=Ceramic, Manufacturer 1=Murata, Max Operating Temperature=85°C, Min Operating Temperature=-55°C, Supplier Part Number 1=490-9961-2-ND, Tolerance=20%, Voltage=10V, Case/Package=0805, Category="Ceramic Capacitors", ComponentLink1Description=http://www.farnell.com/datasheets/2079183.pdf?src-supplier=Farnell, ComponentLink1URL=http://www.farnell.com/datasheets/2079183.pdf?src-supplier=Farnell, ComponentLink2Description=http://components.arrow.com/part/dataview/0323_07199600?src-supplier=Arrow+Europe, ComponentLink2URL=http://components.arrow.com/part/dataview/0323_07199600?src-supplier=Arrow+Europe, ComponentLink3Description=http://psearch.en.murata.com/capacitor/product/GRM21BR61A476ME15%23.pdf?src-supplier=Avnet, ComponentLink3URL=http://psearch.en.murata.com/capacitor/product/GRM21BR61A476ME15%23.pdf?src-supplier=Avnet, ComponentLink4Description=https://search.murata.co.jp/Ceramy/image/img/A01X/G101/ENG/GRM21BR61A476ME15-01.pdf?src-supplier=Digi-Key, ComponentLink4URL=https://search.murata.co.jp/Ceramy/image/img/A01X/G101/ENG/GRM21BR61A476ME15-01.pdf?src-supplier=Digi-Key, ComponentLink5Description=http://search.murata.co.jp/Ceramy/image/img/A01X/G101/ENG/GRM21BR61A476ME15-01.pdf?src-supplier=Digi-Key, ComponentLink5URL=http://search.murata.co.jp/Ceramy/image/img/A01X/G101/ENG/GRM21BR61A476ME15-01.pdf?src-supplier=Digi-Key, ComponentLink6Description=http://www.farnell.com/datasheets/2079183.pdf?src-supplier=Element14, ComponentLink6URL=http://www.farnell.com/datasheets/2079183.pdf?src-supplier=Element14, ComponentLink7Description=http://www.farnell.com/datasheets/2079183.pdf?src-supplier=Newark, ComponentLink7URL=http://www.farnell.com/datasheets/2079183.pdf?src-supplier=Newark, Depth=1.25mm, Dissipation Factor=0.035%, Height=1.25mm, Lead Free="Lead Free", Length=2mm, Manufacturer Part Number 1=GRM21BR61A476ME15L, Mount="Surface Mount", Packaging="Tape and Reel", Pricing 1="3000=0.19360 (USD)", REACH SVHC="No SVHC", RoHS=Yes, RoHS Compliant=Yes, Stock 1=291985, Supplier 1=Digi-Key, Termination=SMD/SMT, Thickness=0.057inch, Voltage Rating=10V, Voltage Rating (DC)=10V, Width=0.049inch
C12 C13 C14 C19 C20 C23 C24 C26: library part CMP-2007-03212-1, Case Code (Imperial)=0805, Case Code (Metric)=2012, Dielectric=X7R, Manufacturer=Murata, Manufacturer Part Number 1=GCJ21BR71H104KA01L, Max Operating Temperature=125°C, Min Operating Temperature=-55°C, Package Quantity=3000, Ratings=AEC-Q200, Supplier Part Number 1=490-5803-1-ND, Tolerance=10%, Voltage Rating=50V, Capacitance=100nF, Case/Package=0805, Category="Ceramic Capacitors", ComponentLink1Description=https://datasheet.ciiva.com/17453/product-17453782.pdf?src-supplier=Avnet+Europe, ComponentLink1URL=https://datasheet.ciiva.com/17453/product-17453782.pdf?src-supplier=Avnet+Europe, ComponentLink2Description=https://datasheet.ciiva.com/18183/getdatasheetpartid-663717-18183469.pdf?src-supplier=Verical, ComponentLink2URL=https://datasheet.ciiva.com/18183/getdatasheetpartid-663717-18183469.pdf?src-supplier=Verical, ComponentLink3Description=https://datasheet.ciiva.com/136/s0717e-136749.pdf?src-supplier=Digi-Key, ComponentLink3URL=https://datasheet.ciiva.com/136/s0717e-136749.pdf?src-supplier=Digi-Key, ComponentLink4Description=https://datasheet.ciiva.com/136/s0717e-136750.pdf?src-supplier=Digi-Key, ComponentLink4URL=https://datasheet.ciiva.com/136/s0717e-136750.pdf?src-supplier=Digi-Key, ComponentLink5Description=https://datasheet.ciiva.com/136/s0717e-136751.pdf?src-supplier=Digi-Key, ComponentLink5URL=https://datasheet.ciiva.com/136/s0717e-136751.pdf?src-supplier=Digi-Key, Construction=Flat, Depth=1.25mm, Features="Soft Termination", Height=1.25mm, Lead Free="Lead Free", Length=2mm, Manufacturer 1=Murata, Mount="Surface Mount", Packaging="Tape and Reel", Part Number=GCJ21BR71H104KA01L, Pricing 1="1=0.48000, 10=0.34200, 50=0.25880, 100=0.22540, 500=0.16698, 1000=0.14193 (USD)", Radiation Hardening=No, RoHS=Yes, RoHS Compliant=Yes, Series=GCJ, Stock 1=105376, Supplier 1=Digi-Key, Termination=SMD/SMT, Thickness=0.057inch, Voltage Rating (DC)=50V, Width=0.049inch
C15 C18: library part CMP-2007-03343-2, "Ceramic Capacitor for Automotive 4.7uF ±10% 16VDC X7R 0805 Embossed T/R", Case Code (Imperial)=0805, Case Code (Metric)=2012, Dielectric=X7R, Manufacturer 1=Murata, Manufacturer Part Number 1=GCM21BR71C475KA73L, Max Operating Temperature=125°C, Min Operating Temperature=-55°C, Package Quantity=1, Ratings=AEC-Q200, Supplier Part Number 1=490-5332-1-ND, Tolerance=10%, Voltage=16V, Capacitance=4.7uF, Case/Package=0805, Category="Ceramic Capacitors", ComponentLink1Description=https://datasheet.ciiva.com/11613/product-11613410.pdf?src-supplier=Avnet, ComponentLink1URL=https://datasheet.ciiva.com/11613/product-11613410.pdf?src-supplier=Avnet, ComponentLink2Description=https://datasheet.ciiva.com/11787/0900766b80ef92d0-11787002.pdf?src-supplier=RSComponents, ComponentLink2URL=https://datasheet.ciiva.com/11787/0900766b80ef92d0-11787002.pdf?src-supplier=RSComponents, ComponentLink3Description=https://datasheet.ciiva.com/140/s0717e-140483.pdf?src-supplier=Digi-Key, ComponentLink3URL=https://datasheet.ciiva.com/140/s0717e-140483.pdf?src-supplier=Digi-Key, ComponentLink4Description=https://datasheet.ciiva.com/140/s0717e-140484.pdf?src-supplier=Digi-Key, ComponentLink4URL=https://datasheet.ciiva.com/140/s0717e-140484.pdf?src-supplier=Digi-Key, Construction=Flat, Depth=1.25mm, Height=1.25mm, Lead Free="Lead Free", Length=2mm, Mount="Surface Mount", Packaging="Tape and Reel", Pricing 1="1=0.37000, 10=0.25300, 50=0.16900, 100=0.14360, 500=0.10138, 1000=0.08870 (USD)", Radiation Hardening=No, REACH SVHC="No SVHC", RoHS=Yes, RoHS Compliant=Yes, Series=GCM, Stock 1=382617, Supplier 1=Digi-Key, Termination=SMD/SMT, Thickness=0.055inch, Voltage Rating=16V, Voltage Rating (DC)=16V, Weight=0.000335oz, Width=0.049inch
C16 C21 C22 C25: library part CMP-2007-00806-1, Case Code (Imperial)=0805, Case Code (Metric)=2012, Dielectric=X7R, Manufacturer=Murata, Manufacturer Part Number 1=GCM216R72A103KA37D, Max Operating Temperature=125°C, Min Operating Temperature=-55°C, Package Quantity=1, Ratings=AEC-Q200, Supplier Part Number 1=490-6060-1-ND, Tolerance=10%, Voltage=100V, Capacitance=10nF, Case/Package=0805, Category="Ceramic Capacitors", ComponentLink1Description=https://datasheet.ciiva.com/11620/product-11620072.pdf?src-supplier=Avnet, ComponentLink1URL=https://datasheet.ciiva.com/11620/product-11620072.pdf?src-supplier=Avnet, ComponentLink2Description=https://datasheet.ciiva.com/18183/getdatasheetpartid-223896-18183680.pdf?src-supplier=Verical, ComponentLink2URL=https://datasheet.ciiva.com/18183/getdatasheetpartid-223896-18183680.pdf?src-supplier=Verical, ComponentLink3Description=https://datasheet.ciiva.com/6270/s0717e-6270558.pdf?src-supplier=Digi-Key, ComponentLink3URL=https://datasheet.ciiva.com/6270/s0717e-6270558.pdf?src-supplier=Digi-Key, ComponentLink4Description=https://datasheet.ciiva.com/16214/s0717e-16214647.pdf?src-supplier=Future+Electronics, ComponentLink4URL=https://datasheet.ciiva.com/16214/s0717e-16214647.pdf?src-supplier=Future+Electronics, Construction=Flat, Depth=1.25mm, Height=0.6mm, Lead Free="Lead Free", Length=2mm, Manufacturer 1=Murata, Mount="Surface Mount", Packaging="Tape and Reel", Part Number=GCM216R72A103KA37D, Pricing 1="1=0.36000, 10=0.24900, 50=0.16640, 100=0.14140, 500=0.09980, 1000=0.08732 (USD)", Radiation Hardening=No, RoHS=Yes, RoHS Compliant=Yes, Series=GCM, Stock 1=2316, Supplier 1=Digi-Key, Termination=SMD/SMT, Thickness=0.028inch, Voltage Rating=100V, Voltage Rating (DC)=100V, Width=0.049inch
C17: library part CMP-2007-00957-1, Case Code (Imperial)=0805, Case Code (Metric)=2012, Dielectric=X5R, Manufacturer=Murata, Manufacturer Part Number 1=GRM216R61E105KA12D, Max Operating Temperature=85°C, Min Operating Temperature=-55°C, Package Quantity=1, Supplier Part Number 1=490-1700-1-ND, Tolerance=10%, Voltage=25V, Capacitance=1uF, Case/Package=0805, Category="Ceramic Capacitors", ComponentLink1Description=https://datasheet.ciiva.com/5424/product-5424880.pdf?src-supplier=Mouser, ComponentLink1URL=https://datasheet.ciiva.com/5424/product-5424880.pdf?src-supplier=Mouser, ComponentLink2Description=https://datasheet.ciiva.com/3777/337grm216r61e105ka1223-3777289.pdf?src-supplier=Arrow+Electronics, ComponentLink2URL=https://datasheet.ciiva.com/3777/337grm216r61e105ka1223-3777289.pdf?src-supplier=Arrow+Electronics, ComponentLink3Description=https://datasheet.ciiva.com/11787/0900766b80ef921d-11787891.pdf?src-supplier=RSComponents, ComponentLink3URL=https://datasheet.ciiva.com/11787/0900766b80ef921d-11787891.pdf?src-supplier=RSComponents, ComponentLink4Description=https://datasheet.ciiva.com/138/partnumbering-e-01-138517.pdf?src-supplier=Digi-Key, ComponentLink4URL=https://datasheet.ciiva.com/138/partnumbering-e-01-138517.pdf?src-supplier=Digi-Key, ComponentLink5Description=https://datasheet.ciiva.com/138/partnumbering-e-01-138519.pdf?src-supplier=Digi-Key, ComponentLink5URL=https://datasheet.ciiva.com/138/partnumbering-e-01-138519.pdf?src-supplier=Digi-Key, ComponentLink6Description=https://datasheet.ciiva.com/138/partnumbering-e-01-138518.pdf?src-supplier=Digi-Key, ComponentLink6URL=https://datasheet.ciiva.com/138/partnumbering-e-01-138518.pdf?src-supplier=Digi-Key, ComponentLink7Description=https://datasheet.ciiva.com/2989/product-2989638.pdf?src-supplier=Avnet, ComponentLink7URL=https://datasheet.ciiva.com/2989/product-2989638.pdf?src-supplier=Avnet, ComponentLink8Description=https://datasheet.ciiva.com/22706/1889704-22706791.pdf?src-supplier=Element14, ComponentLink8URL=https://datasheet.ciiva.com/22706/1889704-22706791.pdf?src-supplier=Element14, ComponentLink9Description=https://datasheet.ciiva.com/7719/c02e-7719049.pdf?src-supplier=Element14, ComponentLink9URL=https://datasheet.ciiva.com/7719/c02e-7719049.pdf?src-supplier=Element14, Construction=Flat, Depth=1.25mm, Height=0.6mm, Lead Free="Lead Free", Length=2mm, Manufacturer 1=Murata, Material=Ceramic, Mount="Surface Mount", Number of Pins=2, Packaging="Tape and Reel", Part Number=GRM216R61E105KA12D, Pricing 1="1=0.40000, 10=0.27800, 50=0.19480, 100=0.16700, 500=0.12524, 1000=0.10575 (USD)", Radiation Hardening=No, REACH SVHC="No SVHC", RoHS=Yes, RoHS Compliant=Yes, Series=GRM, Stock 1=839705, Supplier 1=Digi-Key, Termination=SMD/SMT, Thickness=0.028inch, Voltage Rating=25V, Voltage Rating (DC)=25V, Width=1.25mm
C27 C28: library part CMP-2007-03884-2, "Ceramic Capacitor 18pF ±5% 250VDC C0G 0805 Paper T/R", Case Code (Imperial)=0805, Case Code (Metric)=2012, Dielectric=C0G, Manufacturer 1=Murata, Manufacturer Part Number 1=GQM2195C2E180JB12D, Max Operating Temperature=125°C, Min Operating Temperature=-55°C, Package Quantity=1, Supplier Part Number 1=490-5297-1-ND, Tolerance=5%, Voltage Rating=250V, Capacitance=18pF, Case/Package=0805, Category="Ceramic Capacitors", ComponentLink1Description=https://datasheet.ciiva.com/5420/product-5420568.pdf?src-supplier=Mouser, ComponentLink1URL=https://datasheet.ciiva.com/5420/product-5420568.pdf?src-supplier=Mouser, ComponentLink2Description=https://datasheet.ciiva.com/142/partnumbering-e-01-142348.pdf?src-supplier=Digi-Key, ComponentLink2URL=https://datasheet.ciiva.com/142/partnumbering-e-01-142348.pdf?src-supplier=Digi-Key, ComponentLink3Description=https://datasheet.ciiva.com/142/partnumbering-e-01-142349.pdf?src-supplier=Digi-Key, ComponentLink3URL=https://datasheet.ciiva.com/142/partnumbering-e-01-142349.pdf?src-supplier=Digi-Key, ComponentLink4Description=https://datasheet.ciiva.com/142/partnumbering-e-01-142350.pdf?src-supplier=Digi-Key, ComponentLink4URL=https://datasheet.ciiva.com/142/partnumbering-e-01-142350.pdf?src-supplier=Digi-Key, ComponentLink5Description=https://datasheet.ciiva.com/11607/product-11607802.pdf?src-supplier=Avnet, ComponentLink5URL=https://datasheet.ciiva.com/11607/product-11607802.pdf?src-supplier=Avnet, Construction=Flat, Depth=1.25mm, Height=0.85mm, Length=2mm, Mount="Surface Mount", Packaging="Tape and Reel", Pricing 1="1=1.00000, 10=0.75900, 50=0.63080, 100=0.54320, 500=0.42056, 1000=0.36214 (USD)", Radiation Hardening=No, RoHS=Yes, RoHS Compliant=Yes, Series=GQM, Stock 1=3729, Supplier 1=Digi-Key, Termination=SMD/SMT, Thickness=0.039inch, Voltage Rating (DC)=250V, Width=1.25mm
D1 D2 D3 D4 D5 D6 D7: library part CMP-1426-00009-1, "SMD mono-color Chip LED, WL-SMCW, Bright Green", Case Code (Imperial)=0805, Case Code (Metric)=2012, Color="Bright Green", Forward Current=30mA, Forward Voltage=2V, Manufacturer="Wuerth Elektronik", Manufacturer 1="Wurth Electronics", Manufacturer Part Number 1=150080VS75000, Max Operating Temperature=85°C, Min Operating Temperature=-40°C, Package Quantity=4000, Supplier Part Number 1=732-4986-1-ND, Test Current=20mA, Case/Package=0805, Category=LEDs, ComponentLink1Description="Manufacturer URL", ComponentLink1URL=http://www.we-online.com, ComponentLink2Description=Datasheet, ComponentLink2URL=http://katalog.we-online.com/led/datasheet/150080VS75000.pdf, ComponentLink3Description=https://datasheet.ciiva.com/22656/150080vs75000-22656966.pdf?src-supplier=Element14, ComponentLink3URL=https://datasheet.ciiva.com/22656/150080vs75000-22656966.pdf?src-supplier=Element14, ComponentLink4Description=https://datasheet.ciiva.com/29279/759437-da-01-en-chipled-0805-w-kl-h-gruen-150080vs7500-29279047.pdf?src-supplier=Conrad, ComponentLink4URL=https://datasheet.ciiva.com/29279/759437-da-01-en-chipled-0805-w-kl-h-gruen-150080vs7500-29279047.pdf?src-supplier=Conrad, ComponentLink5Description=https://datasheet.ciiva.com/29563/150080vs75000-29563018.pdf?src-supplier=Digi-Key, ComponentLink5URL=https://datasheet.ciiva.com/29563/150080vs75000-29563018.pdf?src-supplier=Digi-Key, Dominant Wavelength=570nm, Height=0.7mm, Length=2mm, Lens Style=Clear,Rectangular, Luminous Intensity=40mcd, Mount="Surface Mount", PackageReference=0805_A, Packaging="Tape and Reel", PartNumber=150080VS75000, Pricing 1="1=0.18000, 50=0.16500, 100=0.14200, 500=0.12300 (USD)", REACH SVHC=Unknown, RoHS=Yes, Stock 1=20997, Supplier 1=Digi-Key, Viewing Angle=140°, Wavelength=570nm, Width=1.25mm
F1: library part CMP-08605-000033-1, "FUSE BOARD MNT 2A 125VAC/VDC SMD", Manufacturer=Littelfuse, Manufacturer Part Number=0154002.DR, Max Fuse Ac Voltage=125V, Package=0154, Resistance=0.0625Ω, Temperature="-55°C to +125°C", Temperature Range High=+125°C, Temperature Range Low=-55°C, Automotive=No, Category=Fuse, ComponentLink2Description=Datasheet, ComponentLink2URL=https://www.littelfuse.com/~/media/electronics/datasheets/fuses/littelfuse_fuse_154_154t_154l_154tl_datasheet.pdf.pdf, Device Class L1="Circuit Protection", Device Class L2=Fuses, Device Class L3=unset, Digikey Description="FUSE BOARD MNT 2A 125VAC/VDC SMD", Fuse Blow Speed=Fast, Fuse Current=2A, Fuse I2T=8.2A2Sec, Height=3.81mm, Lead Free=Yes, Max Fuse Dc Voltage=125V, Mouser Description="154 Series Fast-Acting 125 V 2 A 9.73 x 5.03 mm OMNI-BLOK® SMT Fuse & Holder", Octopart=https://octopart.com/0154002.dr-littelfuse-565858, RoHS=TRUE, Voltage Rating=125V
FL1: "100ÂµH @ 100kHz 2 Line Common Mode Choke Surface Mount 5.8 kOhms @ 10MHz 150mA DCR 2Ohm", Package=None, Supplier Part Number 1=445-3957-1-ND, Availability=Unavailable, MP=ACT45B-220-2P-TL003, Price=None, Supplier 1=Digi-Key, Supplier 2=Digi-Key, Supplier 3=Digi-Key, Supplier 4=Mouser, Supplier Part Number 2=445-3957-6-ND, Supplier Part Number 3=445-3957-2-ND, Supplier Part Number 4=810-ACT45B2202PTL003
J1: "CONN HEADER SMD 10POS 1.27MM", Color=Black, Manufacturer 1=Samtec, Manufacturer Part Number 1=FTSH-105-01-L-DV-K, Max Current Rating=1.75A, Max Operating Temperature=125°C, Min Operating Temperature=-55°C, Package=None, Package Quantity=1, Supplier Part Number 1=SAM8799-ND, Availability=Unavailable, Category="Headers and Wire Housings", ComponentLink1Description=https://datasheet.ciiva.com/26936/getdatasheetpartid-175877-26936879.pdf?src-supplier=Verical, ComponentLink1URL=https://datasheet.ciiva.com/26936/getdatasheetpartid-175877-26936879.pdf?src-supplier=Verical, ComponentLink2Description=https://datasheet.ciiva.com/22703/ftsh-smt-22703900.pdf?src-supplier=Element14, ComponentLink2URL=https://datasheet.ciiva.com/22703/ftsh-smt-22703900.pdf?src-supplier=Element14, ComponentLink3Description=https://datasheet.ciiva.com/10245/ftsh-mt-10245272.pdf?src-supplier=Avnet, ComponentLink3URL=https://datasheet.ciiva.com/10245/ftsh-mt-10245272.pdf?src-supplier=Avnet, ComponentLink4Description=https://datasheet.ciiva.com/16657/ftsh-mt-16657372.pdf?src-supplier=Avnet+Europe, ComponentLink4URL=https://datasheet.ciiva.com/16657/ftsh-mt-16657372.pdf?src-supplier=Avnet+Europe, ComponentLink5Description=https://datasheet.ciiva.com/728/ftsh-1xx-xx-xxx-dv-xxx-mkt-728872.pdf?src-supplier=Digi-Key, ComponentLink5URL=https://datasheet.ciiva.com/728/ftsh-1xx-xx-xxx-dv-xxx-mkt-728872.pdf?src-supplier=Digi-Key, Connector Type="Male Pin", Contact Material=Bronze, Contact Mating Length=0.12inch, Contact Plating=Gold, Contact Type="Male Pin", Depth=3.43mm, Gender=Male, Housing Color=Black, Housing Material=Polymer, Lead Free="Lead Free", Length=6.35mm, MF=Samtec, Mount="Surface Mount", MP=FTSH-105-01-F-D, Number of Contacts=10, Number of Positions=10, Number of Rows=2, Orientation=Straight, Packaging=Rail/Tube, Pitch=1.27mm, Price=None, Pricing 1="1=3.91000, 10=3.75700, 92=3.13098, 460=2.66135, 1012=2.26997 (USD)", Radiation Hardening=No, REACH SVHC="No SVHC", RoHS=Yes, RoHS Compliant=Yes, Row Spacing=0.05inch, Series=FTSH, SnapEDA_Link=https://www.snapeda.com/parts/FTSH-105-01-F-D/Samtec%20Inc./view-part/105348/?ref=snap, Stock 1=38057, Supplier 1=Digi-Key, Termination=Solder
J2: "Conn Automotive Plug Connector RCP 11 POS 4mm Solder ST Thru-Hole 11 Terminal 1 Port", Package=None, Digi-Key_Part_Number=A122763-ND, Digi-Key_Purchase_URL=https://www.digikey.com/product-detail/en/te-connectivity-amp-connectors/1-776261-1/A122763-ND/5009375?utm_source=snapeda&utm_medium=aggregator&utm_campaign=symbol, EU_RoHS_Compliance=Compliant, MF="TE Connectivity", MP=1-776261-1, SnapEDA_Link=https://www.snapeda.com/parts/1-776261-1/TE%20Connectivity%20AMP%20Connectors/view-part/1465253/?ref=snap, TE_purchase_URL=https://www.te.com/usa-en/product-1-776261-1.html?te_bu=Cor&te_type=disp&te_campaign=seda_glo_cor-seda-global-disp-prtnr-fy19-seda-model-bom-cta_sma-317_1&elqCampaignId=32493
J4: "Molex 2 Position Board Header, RIght Angle", Manufacturer=Molex, Voltage=600V, ComponentLink1Description=Datasheet, ComponentLink1URL=http://www.mouser.com/ds/2/418/NG_CD_1445088_A1-614413.pdf, PartNumber=43650-0209, Published=13Aug2018, Publisher=T.Tallo, Status=Active, TargetLibrary=RITRacing-Connectors
PulseTransformer1: "No Description Available", Supplier Part Number 1=553-1776-1-ND, Built_By=EMA_Cory, Copyright="Copyright (C) 2018 Accelerated Designs. All rights reserved", Manufacturer_Part_Number=PE-68386NLT, RefDes=RefDes, SourceLibrary=Pulse_Electronics_2019-12-18, Supplier 1=Digi-Key, Supplier 2=Digi-Key, Supplier 3=Digi-Key, Supplier 4=Mouser, Supplier Part Number 2=553-1776-6-ND, Supplier Part Number 3=553-1776-2-ND, Supplier Part Number 4=673-PE-68386NLT, Type=DEV, Vendor="Pulse Electronics Corporation"
Q1 Q2: "N-Channel MOSFET, 30V, 3.5A", Manufacturer=Toshiba, ComponentLink1Description=Datasheet, ComponentLink1URL="See Digikey", PartNumber=SSM3K329R,LF, Published=09/27/2017, Publisher=T.Tallo, Status=Active, TargetLibrary=RITRacing-Transistors
R1 R2 R3 R4 R5 R6 R33 R35: "RES SMD 160 OHM 5% 1/2W 0805", Case Code (Imperial)=0805, Case Code (Metric)=2012, Manufacturer 1=Panasonic, Manufacturer Part Number 1=ERJ-P06J161V, Max Operating Temperature=155°C, Max Power Dissipation=500mW, Min Operating Temperature=-55°C, Package=None, Package Quantity=5000, Resistance=160R, Resistor Type="Thick Film", Supplier Part Number 1=P160ADCT-ND, Temperature Coefficient=200ppm/°C, Tolerance=5%, Voltage Rating=150V, Availability=Unavailable, Case/Package=0805, Category="Chip SMD Resistors", ComponentLink1Description=http://www.mouser.com/ds/2/315/AOA0000CE4-64075.pdf?src-supplier=Mouser, ComponentLink1URL=http://www.mouser.com/ds/2/315/AOA0000CE4-64075.pdf?src-supplier=Mouser, ComponentLink2Description=http://www.onlinecomponents.com/datasheet/erj-p06j161v.aspx?p=44459141&src-supplier=Onlinecomponents.com, ComponentLink2URL=http://www.onlinecomponents.com/datasheet/erj-p06j161v.aspx?p=44459141&src-supplier=Onlinecomponents.com, ComponentLink3Description=https://industrial.panasonic.com/cdbs/www-data/pdf/RDO0000/AOA0000C331.pdf?src-supplier=Digi-Key, ComponentLink3URL=https://industrial.panasonic.com/cdbs/www-data/pdf/RDO0000/AOA0000C331.pdf?src-supplier=Digi-Key, ComponentLink4Description=https://industrial.panasonic.com/ww/system/files/data/download/catalog/id_fixed-resistors_e_1.pdf?src-supplier=Digi-Key, ComponentLink4URL=https://industrial.panasonic.com/ww/system/files/data/download/catalog/id_fixed-resistors_e_1.pdf?src-supplier=Digi-Key, ComponentLink5Description=http://industrial.panasonic.com/www-data/pdf/AOA0000/AOA0000CE4.pdf?src-supplier=Avnet, ComponentLink5URL=http://industrial.panasonic.com/www-data/pdf/AOA0000/AOA0000CE4.pdf?src-supplier=Avnet, ComponentLink6Description=http://industrial.panasonic.com/www-data/pdf/AOA0000/AOA0000CE4.pdf?src-supplier=Avnet+Europe, ComponentLink6URL=http://industrial.panasonic.com/www-data/pdf/AOA0000/AOA0000CE4.pdf?src-supplier=Avnet+Europe, Contact Plating=Tin, Features="Automotive AEC-Q200", Height=0.028inch, Lead Free="Contains Lead", Length=0.079inch, Mount="Surface Mount", MP=ERJP06J161V, Number of Terminations=2, Packaging="Tape and Reel", Power Rating=500mW, Price=None, Pricing 1="1=0.12000, 10=0.10800, 100=0.04140, 1000=0.01822, 2500=0.01573 (USD)", Radiation Hardening=No, RoHS=Yes, RoHS Compliant=Yes, Series=ERJ, Stock 1=25408, Supplier 1=Digi-Key, Voltage Rating (DC)=150V, Width=1.2mm